# Altium PCB PCB1.PcbDoc
Units mil, origin at the board's own origin, x right, y up, seen from the top; angles counter-clockwise.
Board outline 3490.03 x 795.03 mil, 2 copper layers (Top Layer, Bottom Layer); 8 components, 4 nets, 17 pads, 0 vias.
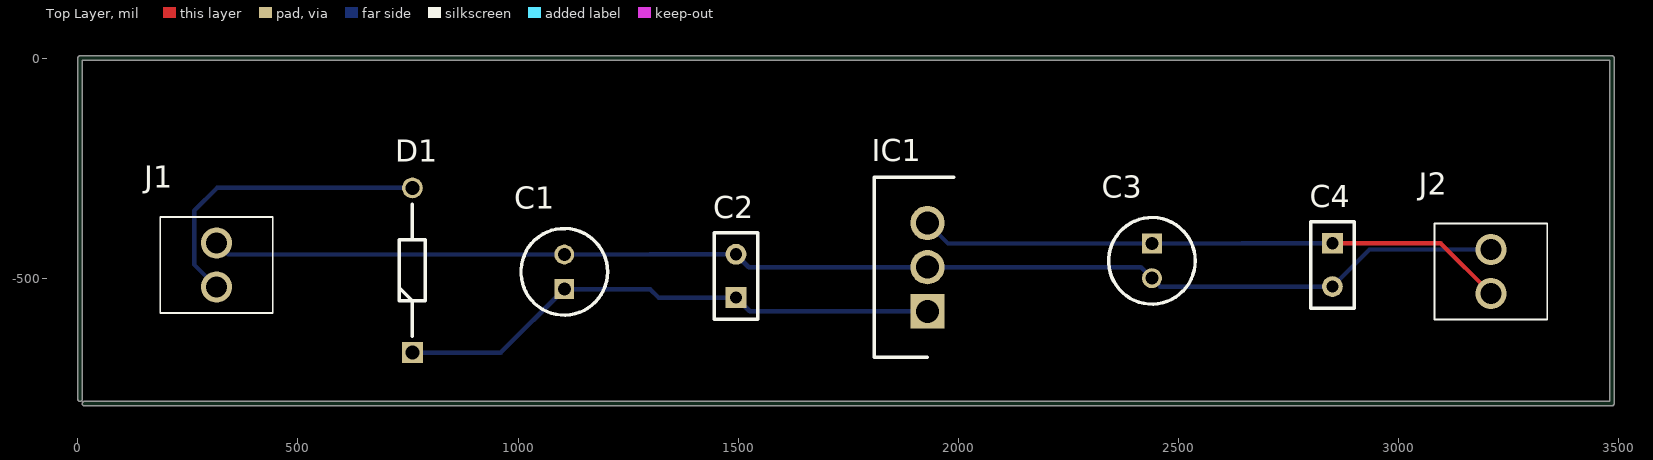
[diagram p0: Top Layer view]
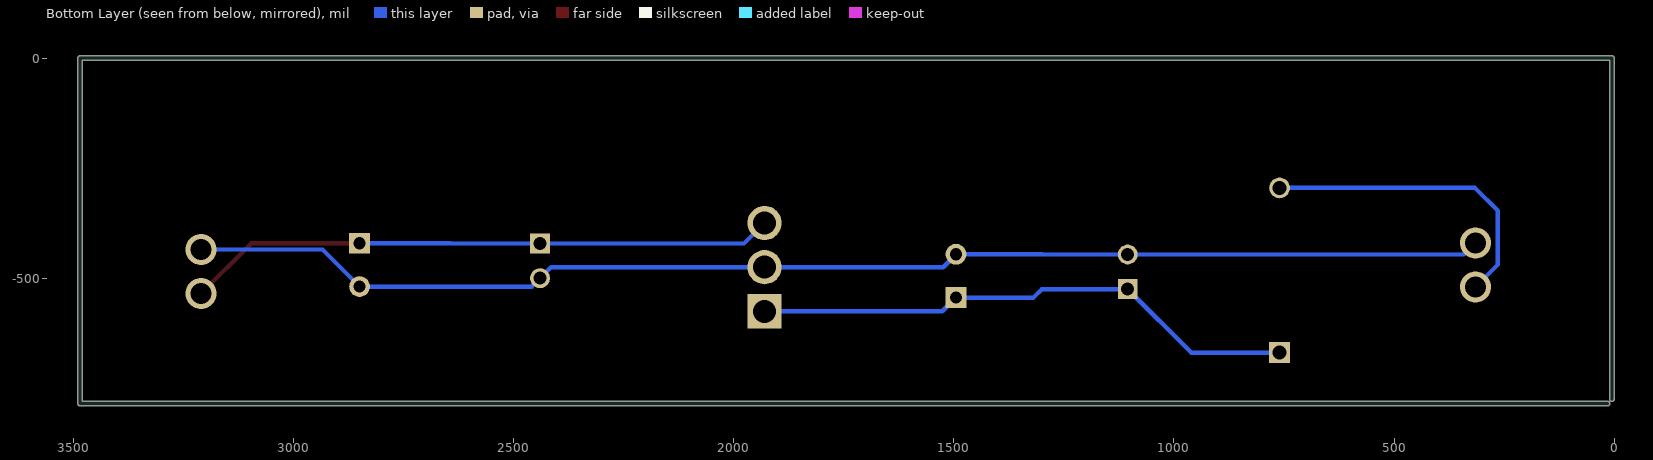
[diagram p1: Bottom Layer view, seen from below]

## Layer stack, top to bottom
Top Solder: solder mask 0.4, Solder Resist, Dk 3.5
Top Layer: signal copper 1.4
Dielectric 1: dielectric 12.6, FR-4, Dk 4.8
Bottom Layer: signal copper 1.4
Bottom Solder: solder mask 0.4, Solder Resist, Dk 3.5

## Board outline
-0.01,-775 -0.01,0 cw(c5,0) 5,5.02 3485,5.02 cw(c3485,0) 3490.02,0 3490.02,-785 cw(c3485,-785) 3485,-790.02 15,-790.02 cw(c15,-785) 15,-779.98 3479.98,-779.98 3479.98,-5.02 10.01,-5.02 10.01,-775 cw(c5,-775)

## Design rules (kind name [scope] priority, off if disabled: settings)
Clearance [All] p1: gap=10 ignorepadtopadclearanceinfootprint=FALSE except(0: Arc-Hole Track-Hole SMDPad-Hole THPad-Hole Via-Hole Fill-Hole Poly-Hole Region-Hole Text-Hole)
PolygonConnect [All] p1: connectstyle=Relief reliefconductorwidth=10 reliefentries=4 polygonreliefangle="90 Angle" airgapwidth=10
RoutingVias [All] p1: holewidth=28 width=50 viastyle="Through Hole" minholewidth=28 minwidth=50 maxholewidth=28 maxwidth=50
SilkToSolderMaskClearance [IsPad] p1: minsilkscreentomaskgap=5 clearancetoexposedcopper=TRUE
SolderMaskExpansion [All] p1: expansion=4 istentingtop=FALSE
Width [All] p1: maxlimit=10 minlimit=10 preferedwidth=10
29 further rules are at their usual default settings.

## Components (designator, comment, footprint, x,y, rotation, side; value= is the part's Value field where it differs from the comment)
C1 "220nF" CAPPRD200W55D500H1250 1105,-525 r90 top
C2 "100nF" FP-RDE0P1-MFG 1495,-495 r90 top
C3 "220nF" CAPPRD200W55D500H1250 2440,-421.26 r270 top
C4 "100nF" FP-RDE0P1-MFG 2850,-470 r270 top
D1 "SD103A-TR" DIOAD950W60L350D150 760,-669.02 r90 top
IC1 "L7805CV" TO255P460X1020X2008-3P 1930,-575.39 r90 top
J1 "1546215-2" 15462152 315,-420 r270 top
J2 "1546215-2" 15462152 3210,-535 r90 top

## Footprints (in the part's own frame and the unit in brackets; to place one, negate y for a bottom-side part, rotate by r counter-clockwise, add the part's x,y. Pads: shape width x height; smd on the part's side, far side on the other; paste and mask are expansions set on the pad)
15462152 [mm]
  round 1.8 hole 1.2: 1(0,0) 2(2.54,0)
  silkscreen extent -1.5,-3.25 4.04,3.25, body extent -1.46,-3.25 4,3.25, height 9.91
CAPPRD200W55D500H1250 [mm]
  rect 1.15x1.15 hole 0.75: 1(0,0)
  round 1.15 hole 0.75: 2(2,0)
  silkscreen extent -1.5,-2.5 3.5,2.5, body extent -1.74,-2.75 3.75,2.75, height 12.5
DIOAD950W60L350D150 [mm]
  rect 1.2x1.2 hole 0.8: 1(0,0)
  round 1.2 hole 0.8: 2(9.5,0)
  silkscreen extent 0.95,-0.75 8.55,0.75, body extent -0.3,-0.84 9.8,0.84, height 1.7
FP-RDE0P1-MFG [mm]
  rect 1.2x1.2 hole 0.7 paste-1000 mask+0: 1(-1.25,0)
  round 1.2 hole 0.7 paste-1000 mask+0: 2(1.25,0)
  silkscreen extent -2.5,-1.25 2.5,1.25, body extent -2.6,-1.35 2.6,1.35, height 0.25
TO255P460X1020X2008-3P [mm]
  rect 1.98x1.98 hole 1.32: 1(0,0)
  round 1.98 hole 1.32: 2(2.55,0) 3(5.1,0)
  silkscreen extent -2.65,-1.53 7.75,3.07, body extent -2.55,-1.53 7.65,3.07, height 20.08

## Part data
C1 C3: library part EEU-FR1H100, "Capacitor Polarised", Manufacturer_Name=Panasonic, Mouser Part Number=667-EEU-FR1H100, Datasheet Link=http://industrial.panasonic.com/cdbs/www-data/pdf/RDF0000/ABA0000C1259.pdf, Height=12.5mm, Manufacturer_Part_Number=EEU-FR1H100, Mouser Price/Stock=https://www.mouser.co.uk/ProductDetail/Panasonic/EEU-FR1H100?qs=tfZGHB2PWd1NAbdNSgjToQ%3D%3D
C2 C4: library part CMP-06035-036375-1, "Ceramic Capacitor 100nF ±10% 25V X7R Radial", Case/Package=Radial, Dielectric=X7R, Max Operating Temperature=125°C, Min Operating Temperature=-55°C, Package Quantity=500, Resistor Type=Ceramic, Tolerance=10%, Voltage Rating=25V, Capacitance=100nF, Height=3.5mm, Height - Seated (Max)=0.236inch, Lead Diameter=0.5mm, Lead Free="Lead Free", Lead Pitch=0.098inch, Length=0.197inch, Mount="Through Hole", Packaging=Bulk, Termination=Radial, Voltage Rating (DC)=25V, Width=0.098inch
D1: "Schottky Diode", Manufacturer_Name=Vishay, Mouser Part Number=625-SD103A, Arrow Part Number=SD103A-TR, Arrow Price/Stock=https://www.arrow.com/en/products/sd103a-tr/vishay?utm_currency=USD&region=nac, Datasheet Link=https://componentsearchengine.com/Datasheets/5/SD103A-TR.pdf, Manufacturer_Part_Number=SD103A-TR, Mouser Price/Stock=https://www.mouser.co.uk/ProductDetail/Vishay-Semiconductors/SD103A-TR?qs=RwahMLkpD2urFD%2FzZdGOBw%3D%3D
IC1: "Integrated Circuit", Manufacturer_Name=STMicroelectronics, Mouser Part Number=511-L7805CV, Arrow Part Number=L7805CV, Arrow Price/Stock=https://www.arrow.com/en/products/l7805cv/stmicroelectronics?utm_currency=USD&region=europe, Datasheet Link=http://www.st.com/web/en/resource/technical/document/datasheet/CD00000444.pdf, Height=4.6mm, Manufacturer_Part_Number=L7805CV, Mouser Price/Stock=https://www.mouser.co.uk/ProductDetail/STMicroelectronics/L7805CV?qs=9NrABl3fj%2FqplZAHiYUxWg%3D%3D
J1 J2: "Connector", Manufacturer_Name="TE Connectivity", Mouser Part Number=571-1546215-2, Arrow Part Number=1546215-2, Arrow Price/Stock=https://www.arrow.com/en/products/1546215-2/te-connectivity?utm_currency=USD&region=nac, Datasheet Link=https://www.te.com/commerce/DocumentDelivery/DDEController?Action=srchrtrv&DocNm=1-1773458-1_EURO_STYLE_QRG&DocType=Data%20Sheet&DocLang=English&PartCntxt=1546215-2&DocFormat=pdf, Height=10.3mm, Manufacturer_Part_Number=1546215-2, Mouser Price/Stock=https://www.mouser.co.uk/ProductDetail/TE-Connectivity/1546215-2?qs=Lxq28tKK6BPmJFoAOY7Ljw%3D%3D

## Nets (pads, with @x,y where several pads share a name; then routed paths per layer and width w, separated by ;. In a path a pad name is that pad's centre, name@x,y a point inside that pad or via, vN(x,y) a via of type N, cw(c..) or ccw(c..) an arc to the next point about the centre after c; other vN are vias at no path point)
5V: C3.1 C4.1 IC1.3 J2.1 | length 1346.8
  Top Layer w10: C4.1 3095.79,-420.79 J2.1
  Bottom Layer w10: IC1.3 1976.65,-421.26 C3.1 2644,-421.26 2644.47,-420.79 C4.1
GND: C1.2 C2.2 C3.2 C4.2 IC1.2 J1.1 J2.2 | length 2971.4
  Bottom Layer w10: J1.1 341.26,-446.26 C1.2 1299,-446.26 1299.47,-445.79 C2.2 1524.21,-475 IC1.2 2415,-475 C3.2 2459.21,-519.21 C4.2 2934.21,-435 J2.2
NetC1_1: C1.1 C2.1 D1.1 IC1.1 | length 1250.5
  Bottom Layer w10: D1.1 960.98,-669.02 C1.1 1300,-525 1319.21,-544.21 C2.1 1526.18,-575.39 IC1.1
VCC: D1.2 J1.2 | length 711.7
  Bottom Layer w10: J1.2 264,-469 264,-347 316,-295 D1.2

## Silkscreen, mask and mechanical layers (free items; w line width, h text height)
cutout:
  lines w10: 164.41,11.8 16.8,11.8 5,0 ; 167.62,2.18 167.62,18.22 ; 5,0 3485,0 3485,-785 15,-785 5,-775 5,0
  text "GND" at 3470,-445 h60 r90
  text "GND" at 100,-455 h60 r90
  text "5v" at 3470,-595 h60 r90
  text "VCC" at 95,-655 h60 r90